# Altium PCB PCB_BGA_Demo.PcbDoc
Units mil, origin at the board's own origin, x right, y up, seen from the top; angles counter-clockwise.
Board outline 6000 x 4000 mil, 6 copper layers (Top Layer, Layer 3, Layer 1, Layer 2, Layer 4, Bottom Layer), stack 34.512 mil thick; 21 components, 42 nets, 118 pads, 35 vias.
Unrouted connection lines stored in the file: 11.
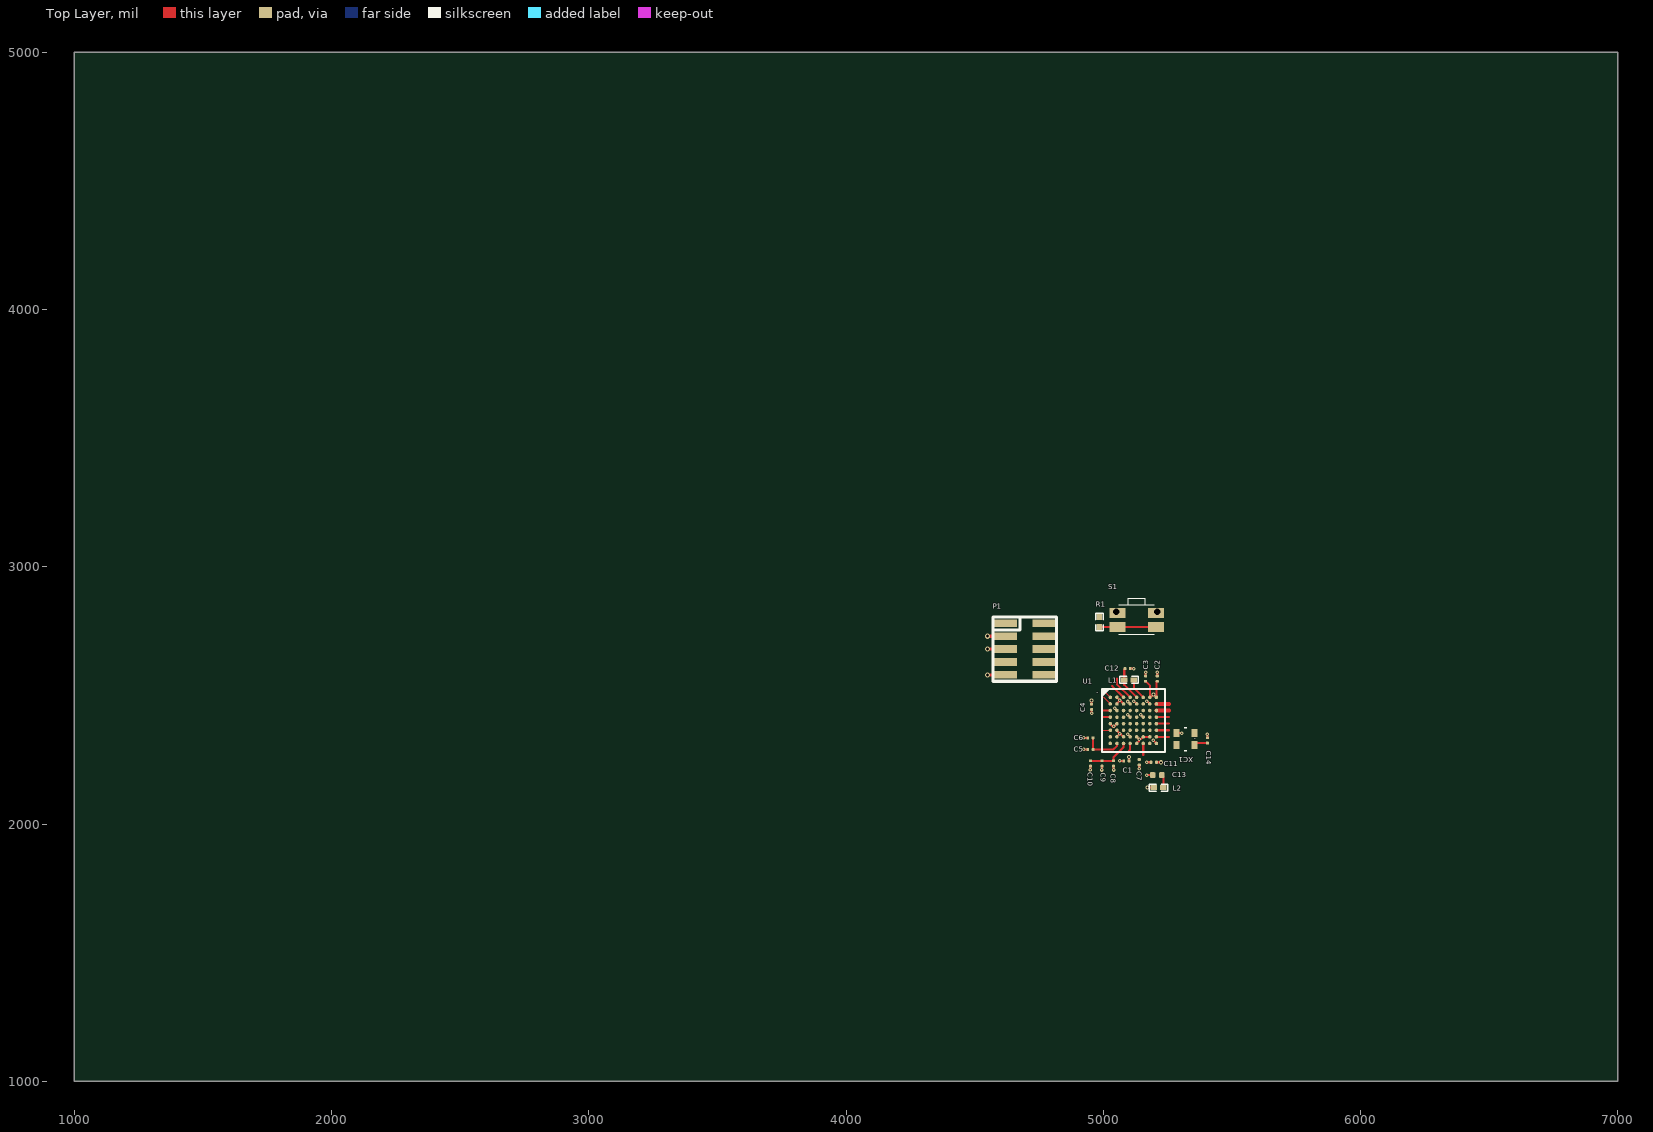
[diagram p0: Top Layer view]
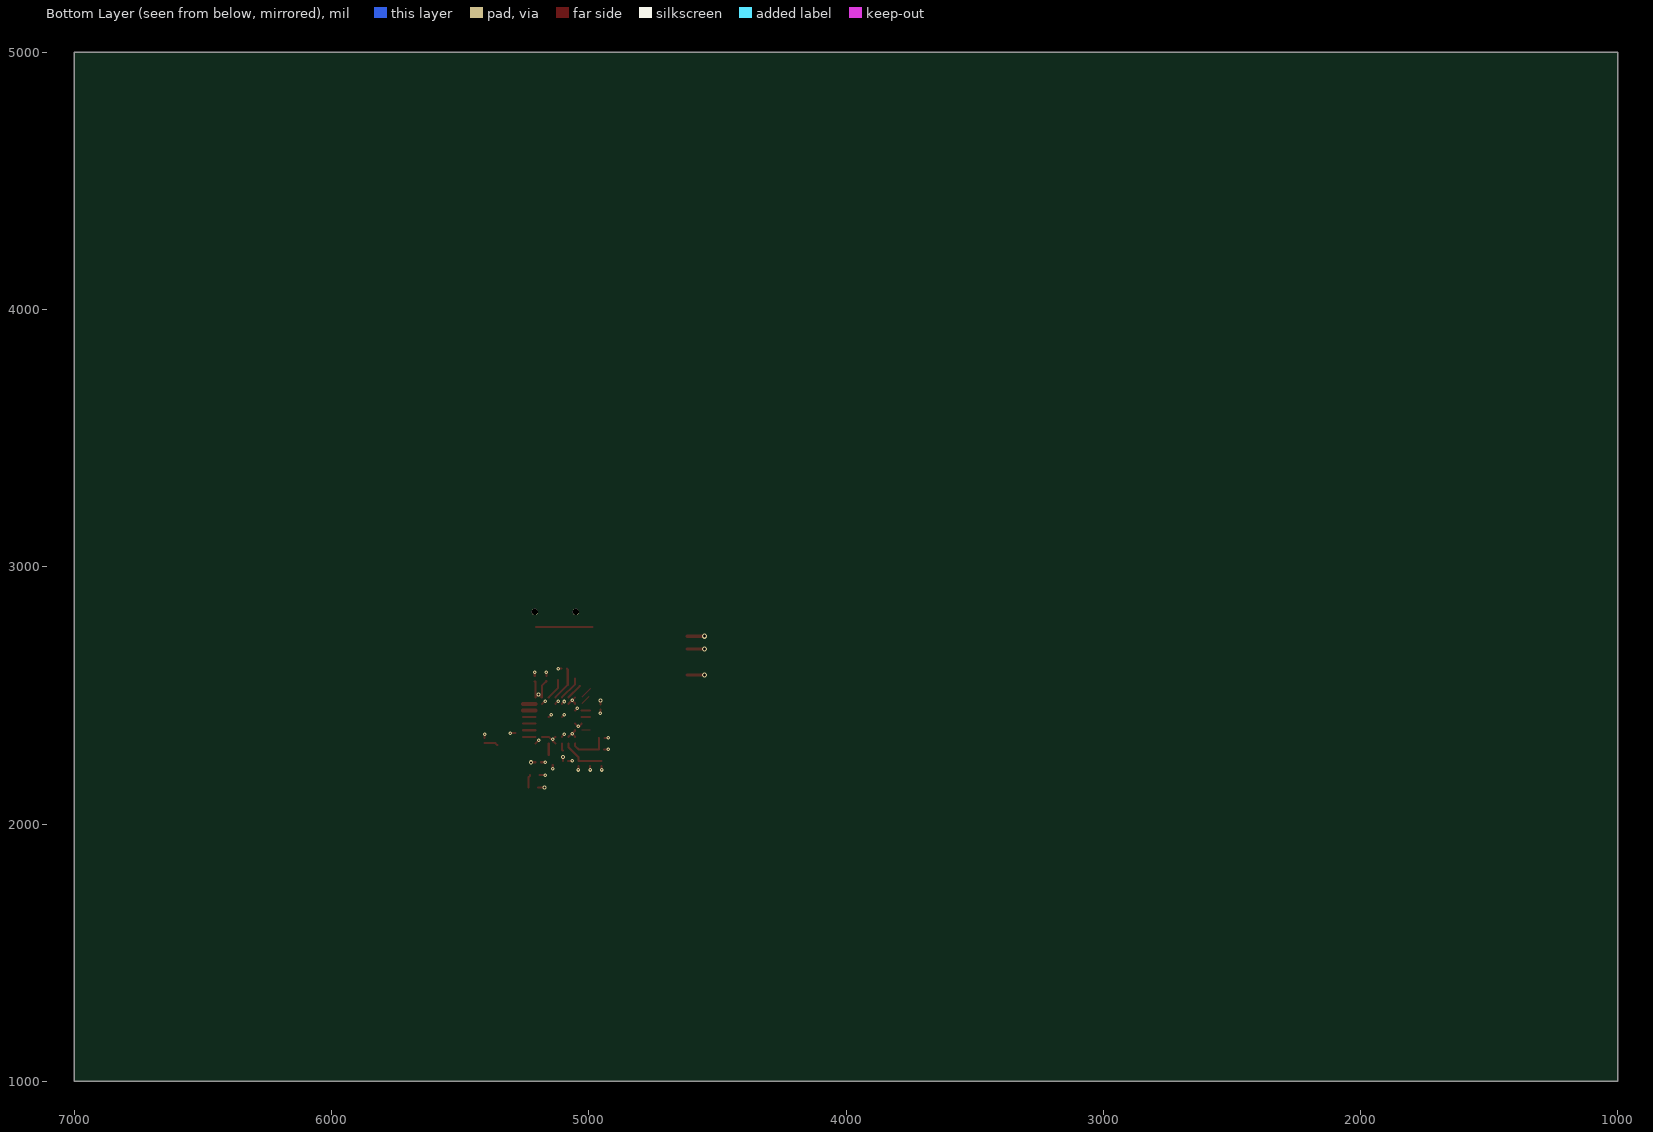
[diagram p1: Bottom Layer view, seen from below]
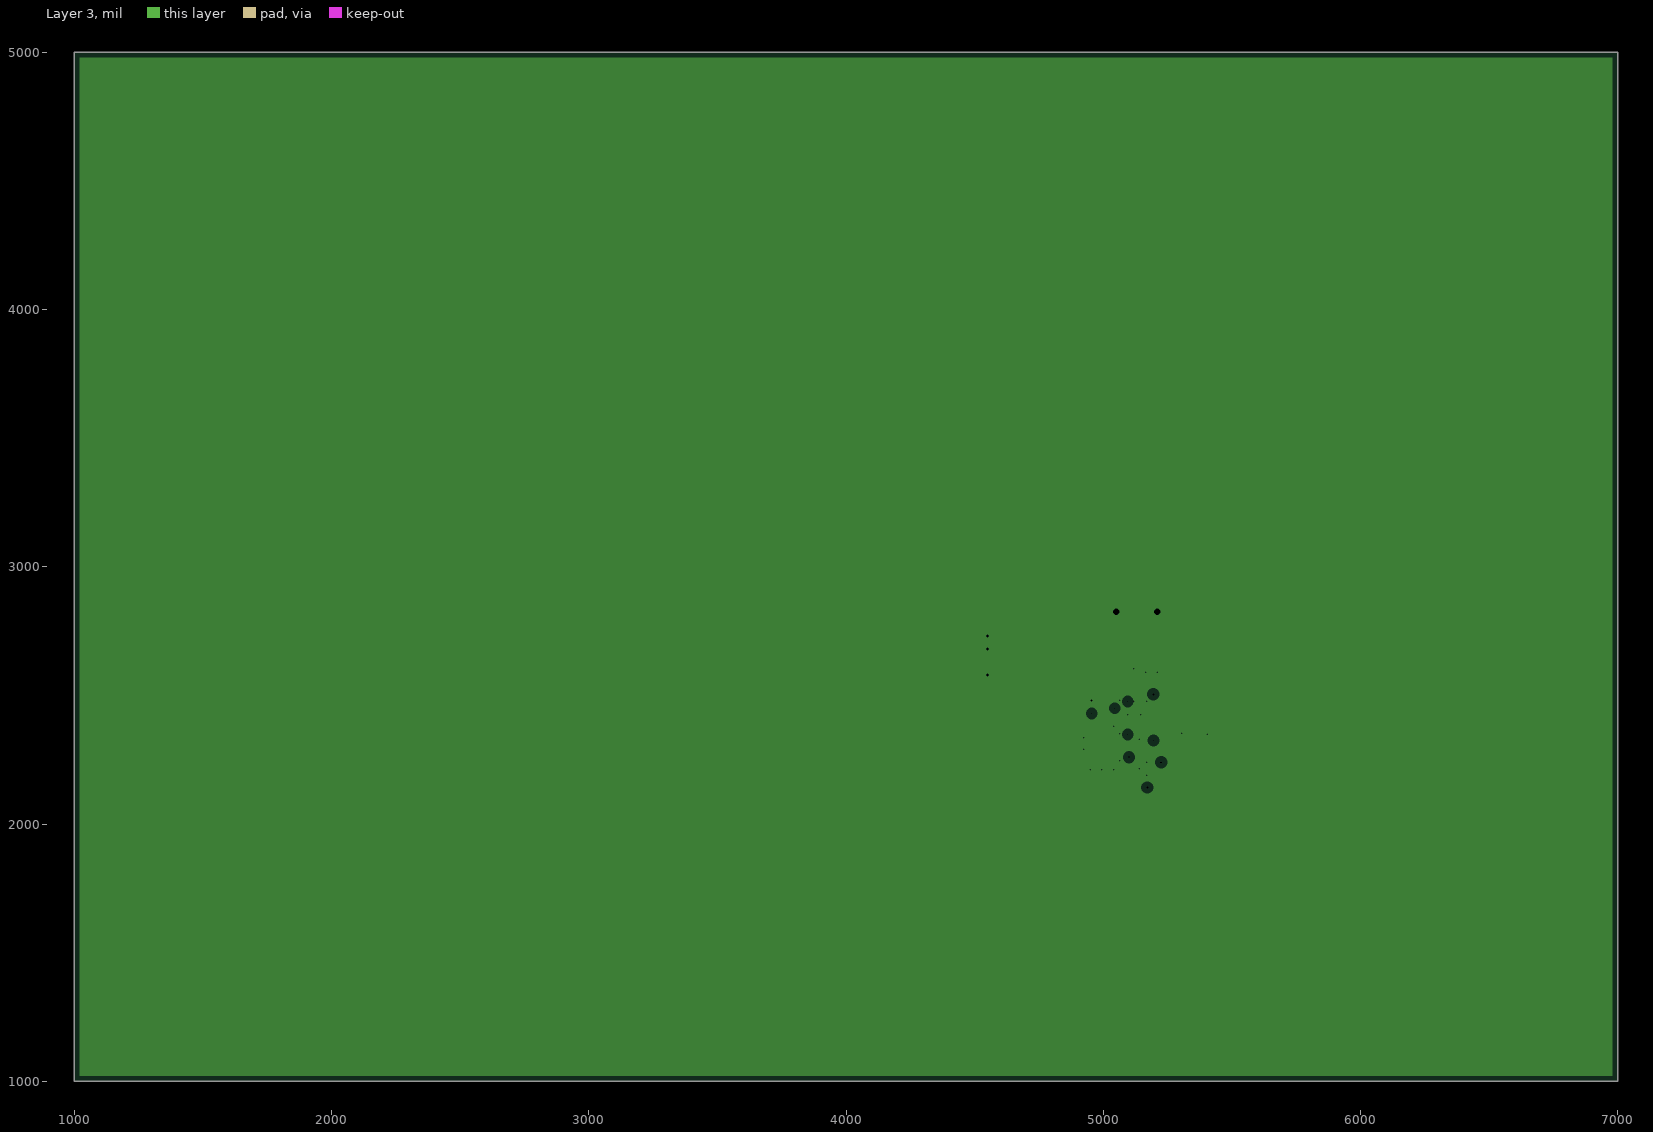
[diagram p2: Layer 3, clearances drawn from the general rule]
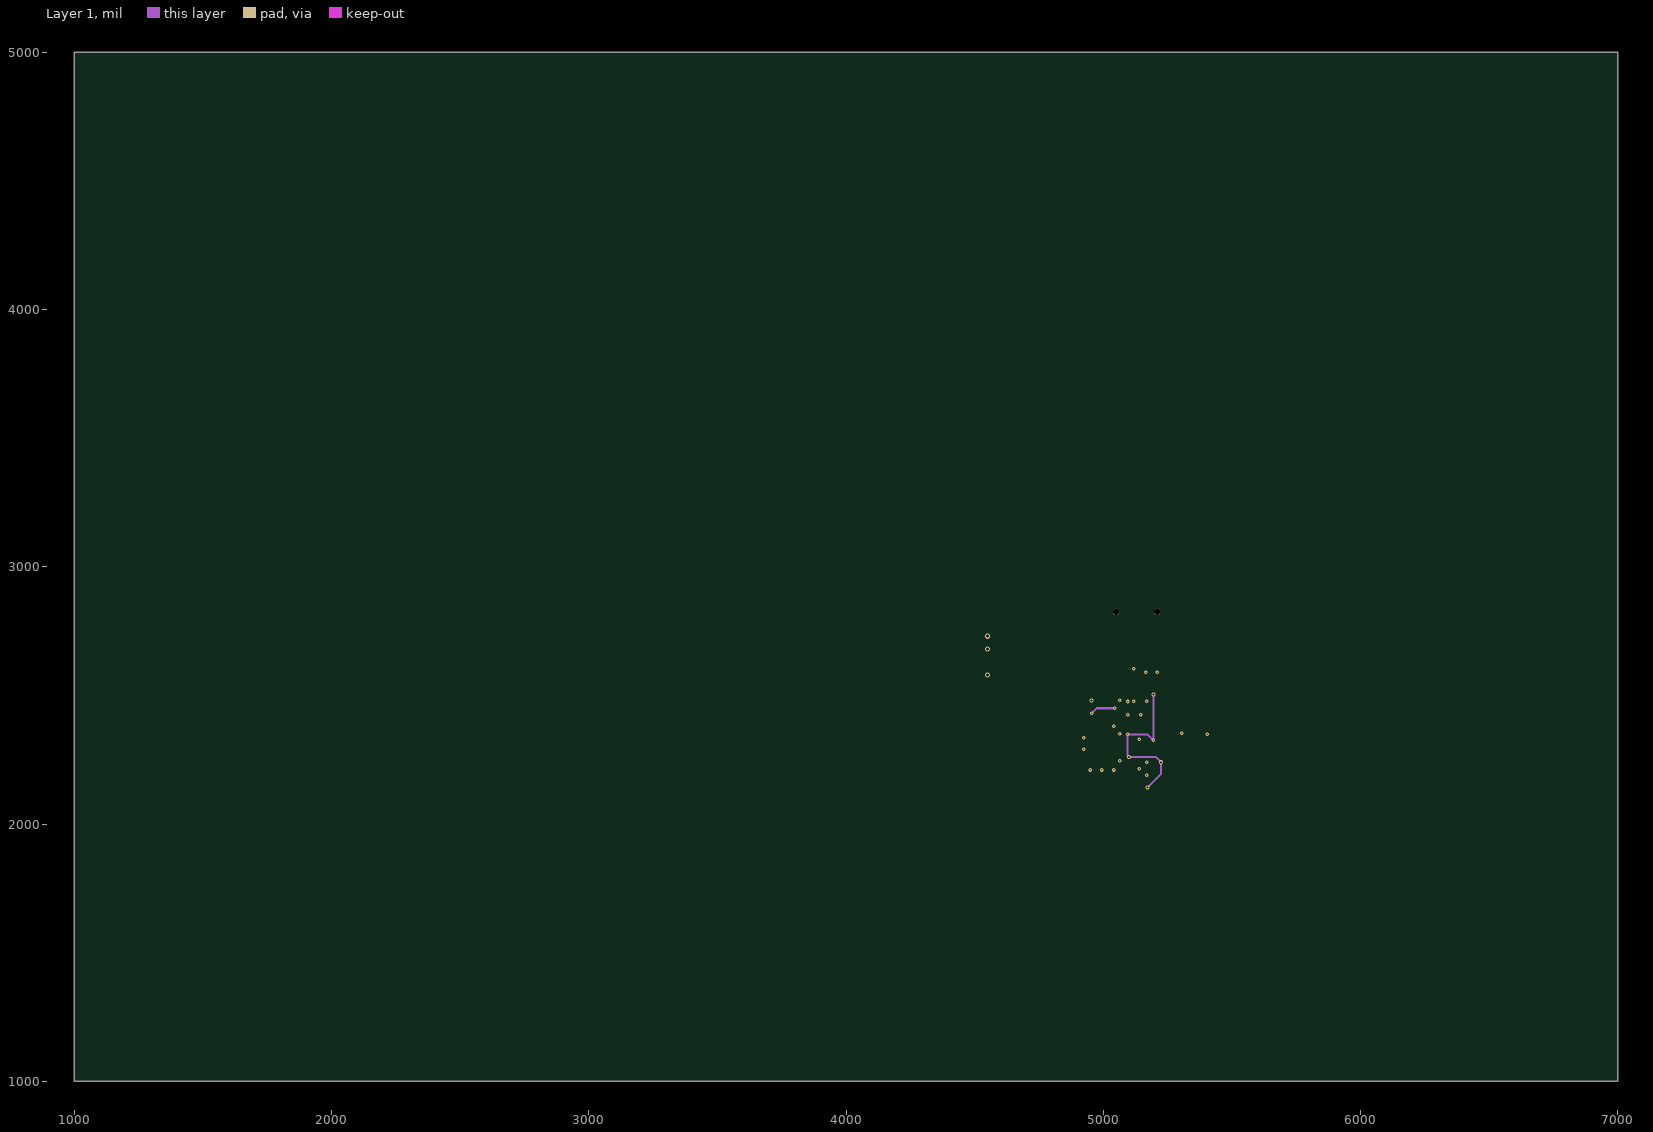
[diagram p3: Layer 1]
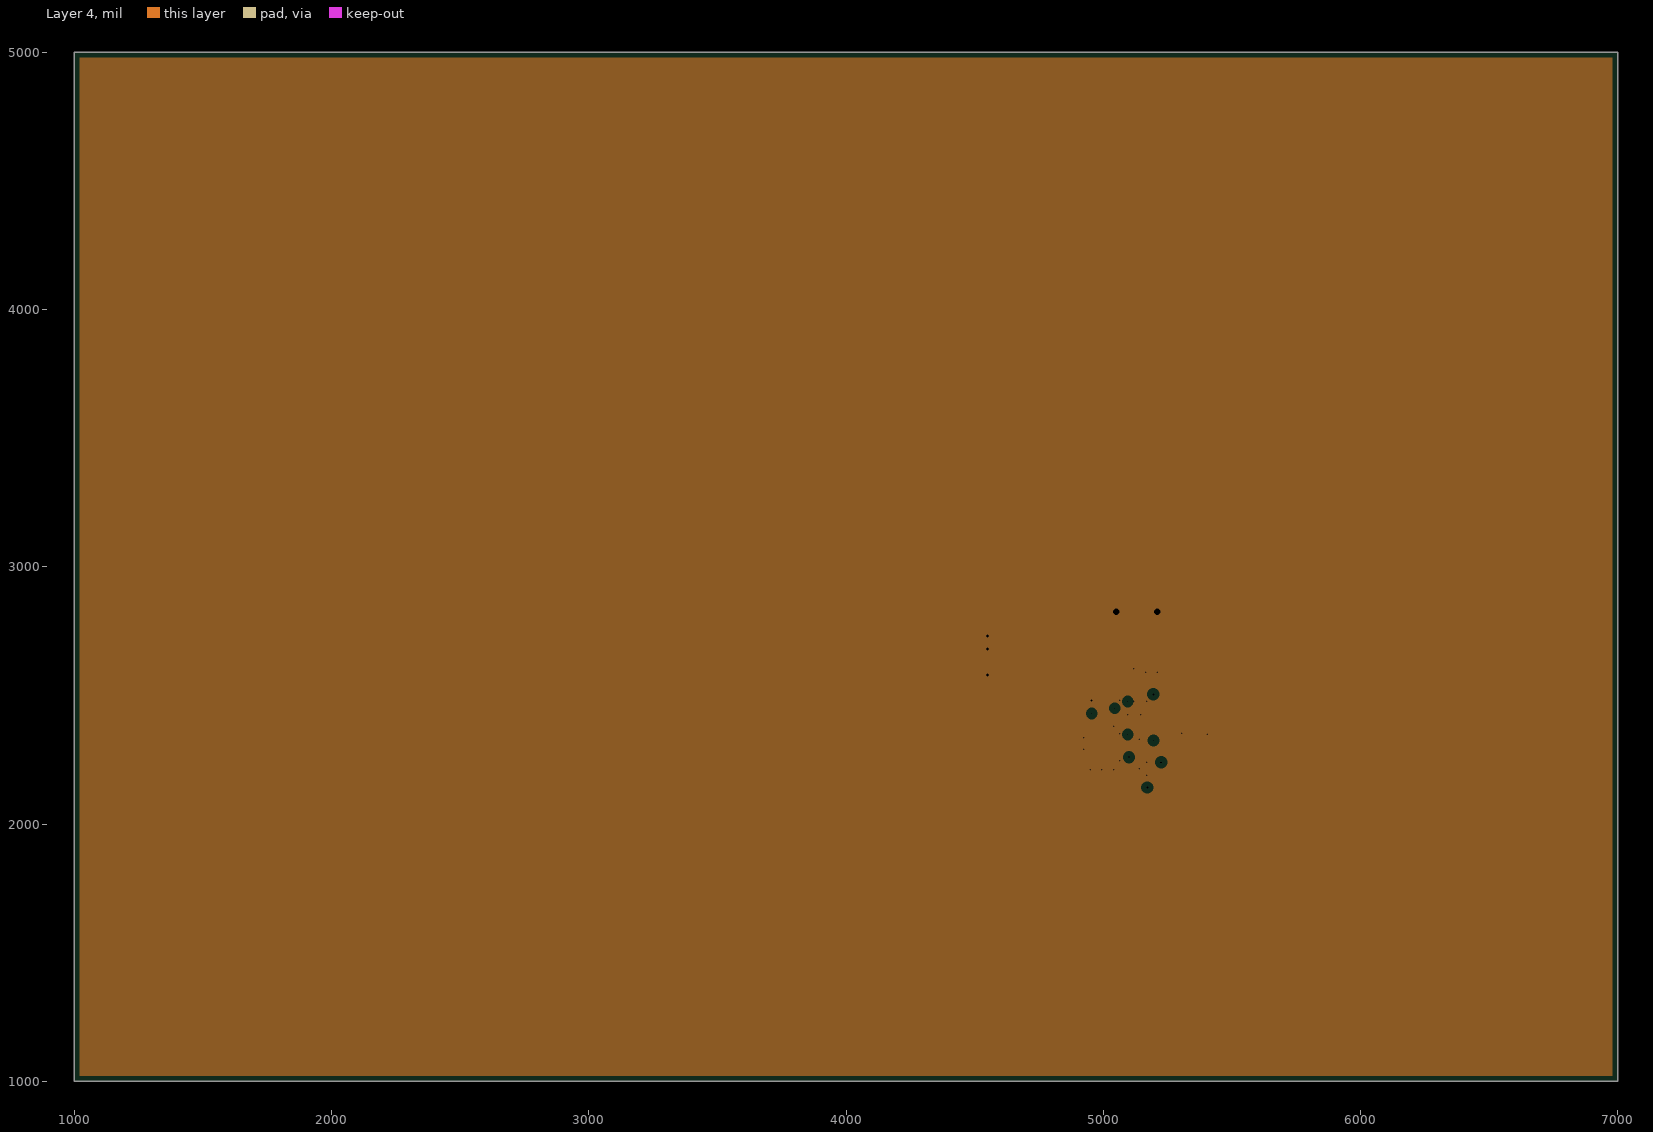
[diagram p4: Layer 4, clearances drawn from the general rule]
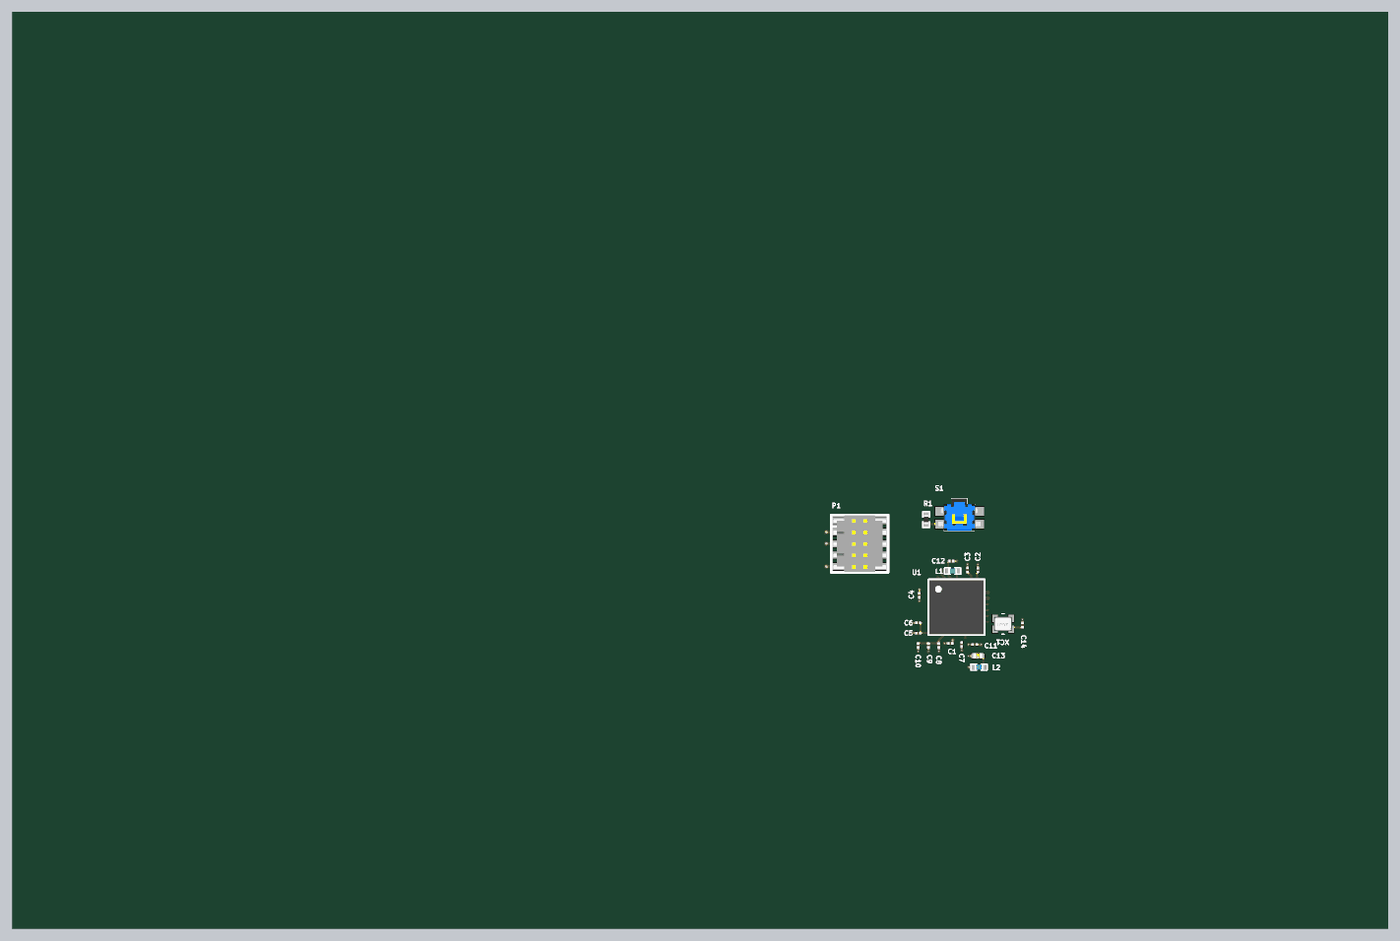
[diagram p5: 3D render of the assembled board from above, using the file's embedded part models]

## Layer stack, top to bottom
Top Solder: solder mask 0.4, Solder Resist, Dk 3.5
Top Layer: signal copper 1.4
Dielectric 4: prepreg 2.8, PP-006, Dk 4.1
Layer 3: plane copper 1.3779, net GND
Dielectric 2: core 4, Core-009, Dk 4.5
Layer 1: signal copper 1.3779
Dielectric 1: dielectric 12.6, FR-4, Dk 4.8
Layer 2: signal copper 1.3779
Dielectric 3: core 4, Core-009, Dk 4.5
Layer 4: plane copper 1.3779, net GND
Dielectric 5: prepreg 2.8, PP-006, Dk 4.1
Bottom Layer: signal copper 1.4
Bottom Solder: solder mask 0.4, Solder Resist, Dk 3.5

## Board outline
1000,1000 7000,1000 7000,5000 1000,5000

## Design rules (kind name [scope] priority, off if disabled: settings)
Clearance [All] p1: gap=4 ignorepadtopadclearanceinfootprint=TRUE
DiffPairsRouting "Schematic Differential Pairs Routing_3" [InNet('DATA_P')] p1: maxlimit=10 minlimit=10 mostfreqgap=10 toplayer_minwidth=15 toplayer_maxwidth=15 toplayer_prefwidth=15 midlayer1_minwidth=15 midlayer1_maxwidth=15 midlayer1_prefwidth=15 midlayer2_minwidth=15 midlayer2_maxwidth=15 midlayer2_prefwidth=15 bottomlayer_minwidth=15 bottomlayer_maxwidth=15 bottomlayer_prefwidth=15 impedanceprofiledriven=TRUE maxuncoupledlength=500
DiffPairsRouting "Schematic Differential Pairs Routing_2" [InNet('DATA_N')] p2: maxlimit=10 minlimit=10 mostfreqgap=10 toplayer_minwidth=15 toplayer_maxwidth=15 toplayer_prefwidth=15 midlayer1_minwidth=15 midlayer1_maxwidth=15 midlayer1_prefwidth=15 midlayer2_minwidth=15 midlayer2_maxwidth=15 midlayer2_prefwidth=15 bottomlayer_minwidth=15 bottomlayer_maxwidth=15 bottomlayer_prefwidth=15 impedanceprofiledriven=TRUE maxuncoupledlength=500
DiffPairsRouting [All] p3: maxlimit=10 minlimit=10 mostfreqgap=10 toplayer_minwidth=15 toplayer_maxwidth=15 toplayer_prefwidth=15 midlayer1_minwidth=15 midlayer1_maxwidth=15 midlayer1_prefwidth=15 midlayer2_minwidth=15 midlayer2_maxwidth=15 midlayer2_prefwidth=15 bottomlayer_minwidth=15 bottomlayer_maxwidth=15 bottomlayer_prefwidth=15 maxuncoupledlength=500
PlaneClearance [All] p1: clearance=20
PlaneConnect [All] p1: planeconnectstyle=Relief reliefexpansion=20 reliefentries=4 reliefconductorwidth=10 reliefairgap=10
PolygonConnect [All] p1: connectstyle=Relief reliefconductorwidth=10 reliefentries=4 polygonreliefangle="90 Angle" airgapwidth=10
RoutingVias [All] p1: holewidth=7.87 width=15.75 viastyle="Through Hole" minholewidth=5.91 minwidth=13.78 maxholewidth=11.81 maxwidth=19.68
SolderMaskExpansion [All] p1: expansion=4
Width "Schematic Width Constraint_1" [InNetClass('50 Ohms Rf')] p1: maxlimit=3.75 minlimit=2.93 preferedwidth=3.75 toplayer_maxwidth=2.93 toplayer_prefwidth=2.93 midlayer1_minwidth=3.5 midlayer1_maxwidth=3.5 midlayer1_prefwidth=3.5 midlayer2_minwidth=3.75 bottomlayer_maxwidth=2.93 bottomlayer_prefwidth=2.93 impedanceprofiledriven=TRUE minimp=50.000000 maximp=50.000000 favimp=50.000000
Width [All] p2: maxlimit=12 minlimit=5 preferedwidth=8
27 further rules are at their usual default settings.

## Classes and differential pairs
differential pair class DiffPCI: DATA
net class "50 Ohms Rf": NetU1_A1 NetU1_B1 NetU1_F1
differential pair DATA: +DATA_P -DATA_N

## Components (designator, comment, footprint, x,y, rotation, side; value= is the part's Value field where it differs from the comment)
C1 "CAP-NONPOL" AP1-00032 5090,2245 r180 top value=100nF
C2 "CAP-NONPOL" AP1-00032 5210,2565 r90 top value=100nF
C3 "CAP-NONPOL" AP1-00032 5165,2565.33 r90 top value=100nF
C4 "CAP-NONPOL" AP1-00032 4955,2455 r90 top value=100nF
C5 "CAP-NONPOL" AP1-00032 4950.33,2290 r180 top value=33pF
C6 "CAP-NONPOL" AP1-00032 4950,2335 r180 top value=100nF
C7 "CAP-NONPOL" AP1-00032 5140,2240 r270 top value=100nF
C8 "CAP-NONPOL" AP1-00032 5040,2235.33 r270 top value=100nF
C9 "CAP-NONPOL" AP1-00032 4995,2235.33 r270 top value=100nF
C10 "CAP-NONPOL" AP1-00032 4950,2235.33 r270 top value=100nF
C11 "CAP-NONPOL" AP1-00032 5196.44,2240 r180 top value=100nF
C12 "CAP-NONPOL" AP1-00032 5095,2603.82 r0 top value=100nF
C13 "CAP-NONPOL" AP1-00101 5210,2190 r180 top value=10uF
C14 "CAP-NONPOL" AP1-00032 5405,2325 r90 top value=100nF
L1 "[APPSSHA]" INDC1005X04L 5100.33,2560.59 r0 top value=BLM15AG121SN1D
L2 "[APPSSHA]" INDC1005X04L 5215,2141.55 r180 top value=BLM15AG121SN1D
P1 "Pin Header 2x5, 1.27mm" HDR_2x5-SMD-1.27mm-K 4695,2680 r270 top
R1 "Chip Resistor 10 kOhm 5% 1/20 W 0201" RESC1005X04L 4985,2785 r90 top value="4.7 k"
S1 "434331013822" 4343x10138xx 5130,2795 r180 top
U1 "ATSAMR34 BGA-64" AP6-00509 5117.2,2402.8 r0 top value=SAMR34J18B
XC1 "ACT33T-4 TCXO" AP7-00106 5320,2330 r180 top value="32MHz TCXO"

## Footprints (in the part's own frame and the unit in brackets; to place one, negate y for a bottom-side part, rotate by r counter-clockwise, add the part's x,y. Pads: shape width x height; smd on the part's side, far side on the other; paste and mask are expansions set on the pad)
4343x10138xx [mm] "WS-TASU 3.5x2.9 mm SMD side push"
  rect 1.6x1 smd: 1(-1.9,0.75) 2(1.9,0.75) 3(-1.9,-0.65) 4(1.9,-0.65)
  round 0.65 hole 0.65: 3(-2.025,-0.75) 4(2.025,-0.75)
  silkscreen extent -1.75,-2.1 1.75,1.45, body extent -2.35,-2.1 2.35,1.45, height 1.35
AP1-00032 [mm]
  rrect50% 0.275x0.3 smd mask+0.064: 1(-0.262,0) 2(0.262,0)
  body extent -0.31,-0.15 0.29,0.15, height 0.3
AP1-00101 [mm]
  rrect50% 0.55x0.6 smd: 1(-0.45,0) 2(0.45,0)
  body extent -0.5,-0.3 0.5,0.3, height 0.2
AP6-00509 [mm]
  round 0.35 smd: A1(-2.275,2.275) A2(-1.625,2.275) A3(-0.975,2.275) A4(-0.325,2.275) A5(0.325,2.275) A6(0.975,2.275) A7(1.625,2.275) A8(2.275,2.275) B1(-2.275,1.625) B2(-1.625,1.625) B3(-0.975,1.625) B4(-0.325,1.625) B5(0.325,1.625) B6(0.975,1.625) B7(1.625,1.625) B8(2.275,1.625) C1(-2.275,0.975) C2(-1.625,0.975) C3(-0.975,0.975) C4(-0.325,0.975) C5(0.325,0.975) C6(0.975,0.975) C7(1.625,0.975) C8(2.275,0.975) D1(-2.275,0.325) D2(-1.625,0.325) D3(-0.975,0.325) D4(-0.325,0.325) D5(0.325,0.325) D6(0.975,0.325) D7(1.625,0.325) D8(2.275,0.325) E1(-2.275,-0.325) E2(-1.625,-0.325) E3(-0.975,-0.325) E4(-0.325,-0.325) E5(0.325,-0.325) E6(0.975,-0.325) E7(1.625,-0.325) E8(2.275,-0.325) F1(-2.275,-0.975) F2(-1.625,-0.975) F3(-0.975,-0.975) F4(-0.325,-0.975) F5(0.325,-0.975) F6(0.975,-0.975) F7(1.625,-0.975) F8(2.275,-0.975) G1(-2.275,-1.625) G2(-1.625,-1.625) G3(-0.975,-1.625) G4(-0.325,-1.625) G5(0.325,-1.625) G6(0.975,-1.625) G7(1.625,-1.625) G8(2.275,-1.625) H1(-2.275,-2.275) H2(-1.625,-2.275) H3(-0.975,-2.275) H4(-0.325,-2.275) H5(0.325,-2.275) H6(0.975,-2.275) H7(1.625,-2.275) H8(2.275,-2.275)
  silkscreen extent -3.1,-3.1 3.1,3.1, body extent -3,-3 3,3, height 1.2
AP7-00106 [mm]
  rect 0.6x0.8 smd: 1(-0.9,-0.6) 2(0.9,-0.6) 3(0.9,0.6) 4(-0.9,0.6)
  silkscreen extent -0.13,-1.14 0.14,1.14, body extent -1,-0.8 1,0.8, height 0.59
HDR_2x5-SMD-1.27mm-K [mm]
  rect 0.76x2.4 smd: 1(-2.54,-1.95) 2(-2.54,1.95) 3(-1.27,-1.95) 4(-1.27,1.95) 5(0,-1.95) 6(0,1.95) 7(1.27,-1.95) 8(1.27,1.95) 9(2.54,-1.95) 10(2.54,1.95)
  silkscreen extent -3.18,-3.15 3.18,3.15, body extent -3.14,-2.92 3.14,2.92, height 6.11
INDC1005X04L [mm] "Chip Inductor, 2-Leads, Body 1.0x0.5mm, IPC High Density"
  rect 0.65x0.5 smd: 1(-0.475,0) 2(0.475,0)
  silkscreen extent -0.9,-0.35 0.9,0.35, body extent -0.5,-0.3 0.5,0.3, height 0.5
RESC1005X04L [mm]
  rect 0.6x0.55 smd: 1(-0.5,0) 2(0.5,0)
  silkscreen extent -0.87,-0.38 0.88,0.38, body extent -0.5,-0.25 0.5,0.25, height 0.3

## Part data
C1 C2 C3 C4 C5 C6 C7 C8 C9 C10 C11 C12: "Ceramic capacitor, SMD 0201, C0G/NP0, 25V, +/-2%", Manufacturer="Johanson Technology", MPN=250R05L330GV4T, TemperatureRange="-55 to +125 deg", Tolerance=+/-2%, AN=A01-0831, ComponentStatus="'Active (verified)'", FootprintStatus="'Active (Verified)'", Height=0.0130000002682209, PartGroup="Capacitors,Ceramic,SMD 0201", Status=Active, Verified by="Lars Helge Mo", Verified date=2005-12-15
C13: "Ceramic capacitor, SMD 0402, X5R, 6.3V, 20%", Manufacturer=Murata, MPN=GRM155R60J106ME15, TemperatureRange="-55 to 85 Deg.C", Tolerance=+/-20%, AN=A01-0778, ComponentStatus="'Active (verified)'", FootprintStatus="'Active (Verified)'", Height=0.5, PartGroup="Capacitors,Ceramic,SMD 0402", Status=Active, Verified by="Lars Helge Mo", Verified date=2005-12-15
C14: library part CAP-NONPOL_3, "Ceramic capacitor, SMD 0201, C0G/NP0, 25V, +/-2%", Manufacturer="Johanson Technology", MPN=250R05L330GV4T, TemperatureRange="-55 to +125 deg", Tolerance=+/-2%, AN=A01-0831, ComponentStatus="'Active (verified)'", FootprintStatus="'Active (Verified)'", Height=0.0130000002682209, PartGroup="Capacitors,Ceramic,SMD 0201", Status=Active, Verified by="Lars Helge Mo", Verified date=2005-12-15
L1 L2: library part INDUCTOR, "Chip Bead, 120ohm@100Mhz, 0.55A, 0402, Rdc 0.19ohm", Manufacturer=Murata, MPN=BLM15AG121SN1D, TemperatureRange="-55 to +125℃", Tolerance=25%, AN=A03-0216, ComponentStatus="'New (not verified)'", FootprintStatus="'Active (Verified)'", Height=0.600000023841858, PartGroup=Inductors,EMI, Status=Active, Verified by="Lars Helge Mo", Verified date=2006-01-30
P1: "Pin Header 2x5, 1.27mm (50mil), SMD, Keying Shroud", 2nd source part number=FTSH-105-01-F-DV-K, Manufacturer=W-CON, Manufacturer Part Number=3132-10MS0BK00R1, Part Number="Pin Header 2x5 SMD, 1.27mm, KS", 2nd source Supplier=Samtec, Artikkelnr Noca=55010009, Artikkelnr Simpro=N.A., Datasheet=\\hizz\pro\app9717\Datasheet\connectores\W-CON\3132-XXMXXBK00XX.pdf, Footprint Doc=HDR_2x5-SMD-1.27mm, LatestRevisionDate=2016-04-21, Pin Count=10, Published=2016-01-22, Publisher="Nordic Semiconductor", Supplier=Cabcon, Supplier part number=3132-10MS0BK00R1
R1: library part R2_2, "Thick film resistor, SMD 0201, 1/20W, 5%", Manufacturer=ROHM, MPN=MCR006YZPJ472, TemperatureRange=5%, AN=A02-0536, ComponentStatus="'Active (verified)'", FootprintStatus="'Active (Verified)'", PartGroup="Resistors,SMD,0201 5%", Status=Active, Verified by="Lars Helge Mo", Verified date=2005-12-19
S1: "WS-TASU SMT Tact Switch 3.5x2.9mm side push", Operating Temperature="-40 to +85degC", Rated Current=50mA, Rated Voltage=12VDC, ComponentLink1Description=Manufacturer, ComponentLink1URL=http://www.we-online.de, ComponentLink2Description=Datasheet, ComponentLink2URL=https://katalog.we-online.com/em/datasheet/434331013822.pdf, Contact Material="Stainless Steel", Contact Plating=Silver, Height=1.35mm, Mounting Technology=SMT, Operation Force=220g, Packaging="Tape and Reel", Part Number=434331013822, Published Date="September 2019", Publisher="Wurth Elektronik", Terminal Material="Copper Alloy", Terminal Plating=Silver, Washable=No
U1: "SAMR34 BGA-64", AN=A06-1593, ComponentStatus="'New (not verified)'", FootprintStatus="'New (Not verified)'", Height=1.20000004768372, PartGroup="Integrated Circuits"
XC1: "32MHz TCXO, 2.8 ~ 3.3V, Clipped sine wave 10kOhm/10pF, 2 x 1.6 mm SMD", Manufacturer="Taitien Electronics", MPN=TYETBCSANF-32.000000, TemperatureRange="-20  to  +70°C", Tolerance=+/-1ppm, AN=A07-0161, ComponentStatus="'New (not verified)'", Height=0.800000011920929, PartGroup="Frequency devices,Oscillators"

## Via types
v1: diameter 13.78, hole 5.91, Top Layer to Bottom Layer, tented both sides, 27 vias
v2: diameter 15.75, hole 7.87, Top Layer to Bottom Layer, tented both sides, 5 vias
v3: diameter 19.68, hole 11.81, Top Layer to Bottom Layer, tented both sides, 3 vias

## Nets (pads, with @x,y where several pads share a name; then routed paths per layer and width w, separated by ;. In a path a pad name is that pad's centre, name@x,y a point inside that pad or via, vN(x,y) a via of type N, cw(c..) or ccw(c..) an arc to the next point about the centre after c; other vN are vias at no path point)
DATA_N: U1.B8 | length 48.2
  Top Layer w15: U1.B8 5255,2466.77
DATA_P: U1.C8 | length 48.2
  Top Layer w15: U1.C8 5255,2441.18
GND: C1.2 C2.2 C3.2 C4.2 C5.2 C6.2 C7.2 C8.2 C9.2 C10.2 C11.2 C12.2 C13.2 C14.2 P1.3 P1.5 P1.9 S1.3 S1.4 U1.A2 U1.B2 U1.B3 U1.B5 U1.B7 U1.D4 U1.D6 U1.E1 U1.E2 U1.F2 U1.G2 U1.G3 U1.G5 U1.G6 U1.G7 U1.H5 XC1.2 | length 723.8
  Top Layer w8: v1(4925,2290) C5.2 ; v1(4925,2335) C6.2 ; v1(4950,2210) C10.2 ; C4.2 v2(4955,2480) ; v1(4995,2210) C9.2 ; U1.E1 5027.64,2389.13 v1@5040,2376.77 ; v1(5040,2210) C8.2 ; v1(5040,2380) v1@5040,2376.77 ; U1.G2 v1(5065,2350.59) ; U1.F2 5053.23,2362.85 5056.12,2359.96 5056.12,2359.47 v1(5065,2350.59) ; U1.E2 v1@5040,2376.77 ; U1.B2 5053.23,2468.34 5056.12,2471.23 5056.12,2471.71 v1(5065,2480.59) ; U1.A2 v1(5065,2480.59) ; v1(5065,2245) C1.2 ; U1.G3 5068.15,2349.48 5066.11,2349.48 v1(5065,2350.59) ; U1.B3 v1(5065,2480.59) ; v1(5095,2425) U1.D4 ; C12.2 v1(5117.85,2603.82) ; v1(5119.04,2477.74) U1.B5 ; U1.H5 5130,2313.5 5138.89,2322.4 5138.89,2327.71 v1(5140,2328.82) ; U1.G5 v1(5140,2328.82) ; v1(5140,2215) C7.2 ; v1(5146.42,2424.76) U1.D6 ; C3.2 v1(5165,2590) ; v1(5170,2190) C13.2 ; v1(5170,2240) C11.2 ; v1(5170,2477.95) U1.B7 ; U1.G7 U1.G6 5155.31,2338.82 5146.42,2329.92 5141.11,2329.92 v1(5140,2328.82) ; C2.2 v1(5210,2590) ; XC1.2 v1(5305,2353.62) ; C14.2 v1(5405,2349.48)
  Top Layer w12: v3(4550,2580) P1.9 ; v3(4550,2680) P1.5 ; v3(4550,2730) P1.3
NetC4_1: C4.1 U1.C2 | length 124.8
  Top Layer w8: v1(4955,2430) C4.1 ; v1(5044.41,2450) U1.C2
  Layer 1 w8: v1(4955,2430) 4975,2450 v1(5044.41,2450)
NetC5_1: C5.1 C6.1 U1.H2 | length 153.2
  Top Layer w8: C6.1 4960.67,2334.67 C5.1 5040,2290 5052.87,2302.87 5052.87,2312.87 U1.H2
NetC7_1: C7.1 U1.H4 | length 29.9
  Top Layer w8: 5100.33,2285 5104.41,2289.07 U1.H4
NetC12_1: C12.1 L1.1 U1.A5 | length 132.7
  Top Layer w8: C12.1 5084.67,2603.33 5081.63,2600.3 L1.1 5081.63,2540.73 U1.A5
NetC14_1: C14.1 U1.F5 XC1.4 | length 53.3
  Top Layer w8: XC1.4 5355.43,2306.85 5363.24,2314.67 C14.1
NetL1_2: L1.2 U1.A6 | length 83.4
  Top Layer w8: L1.2 5119.04,2528.92 U1.A6
NetP1_2: P1.2 U1.D5
NetP1_4: P1.4 U1.C5
NetP1_10: P1.10 R1.1 S1.1 S1.2 U1.B6 | length 219.9
  Top Layer w8: R1.1 5055.04,2765.32 S1.2 S1.1
NetU1_A1: U1.A1 | length 46.2
  Top Layer w2.93: 4995,2525 U1.A1
NetU1_A3: U1.A3 | length 62
  Top Layer w8: 5035,2536.18 U1.A3
NetU1_A4: U1.A4 | length 93.8
  Top Layer w8: 5053.23,2565 5053.23,2543.54 U1.A4
NetU1_B1: U1.B1 | length 39.1
  Top Layer w2.93: 5000,2494.41 U1.B1
NetU1_B4: U1.B4 | length 13.3
  Top Layer w8: v1(5095,2476.18) U1.B4
NetU1_C3: U1.C3
NetU1_C4: U1.C4
NetU1_C6: U1.C6
NetU1_C7: U1.C7
NetU1_D1: U1.D1 | length 32.6
  Top Layer w8: 4995,2415.59 U1.D1
NetU1_D2: U1.D2
NetU1_D3: U1.D3
NetU1_D7: U1.D7
NetU1_D8: U1.D8 | length 48.2
  Top Layer w8: U1.D8 5255,2415.59
NetU1_E3: U1.E3
NetU1_E4: U1.E4
NetU1_E5: U1.E5
NetU1_E6: U1.E6
NetU1_E7: U1.E7
NetU1_E8: U1.E8 | length 48.2
  Top Layer w8: U1.E8 5255,2390
NetU1_F1: U1.F1 | length 33.2
  Top Layer w2.93: 4994.41,2364.41 U1.F1
NetU1_F3: U1.F3
NetU1_F4: U1.F4
NetU1_F6: U1.F6
NetU1_F7: U1.F7
NetU1_F8: U1.F8 | length 48.2
  Top Layer w8: U1.F8 5255,2364.41
NetU1_G8: U1.G8 | length 48.2
  Top Layer w8: U1.G8 5255,2338.82
NetU1_H6: U1.H6 XC1.3 | length 45.4
  Top Layer w8: 5155.59,2267.88 U1.H6
VDD: C1.1 C2.1 C3.1 C11.1 L2.2 P1.1 R1.2 U1.A7 U1.A8 U1.G4 U1.H8 | length 889.4
  Top Layer w8: v1(5095,2348.23) U1.G4 ; C1.1 v2(5100.33,2259.67) ; C3.1 5165.49,2555 5166.91,2553.59 5166.91,2553.09 5181.18,2538.82 U1.A7 5182.75,2492.36 5185.63,2495.25 5186.12,2495.25 v2(5195,2504.13) U1.A8 5206.77,2551.44 5208.09,2552.76 5208.09,2553.25 5209.51,2554.67 C2.1 ; v2(5171.55,2141.55) L2.2 ; v1(5195,2325) U1.H8 ; C11.1 v2(5225,2240)
  Layer 1 w8: v2(5171.55,2141.55) 5225,2195 v2(5225,2240) 5205.33,2259.67 v2(5100.33,2259.67) 5100.33,2261.76 5095,2267.1 v1(5095,2348.23) 5171.77,2348.23 v1(5195,2325) v2(5195,2504.13)
VDDANA: C8.1 C9.1 C10.1 C13.1 L2.1 U1.C1 U1.H3 | length 257.2
  Top Layer w8: C10.1 C9.1 C8.1 5040,2260 5078.82,2298.82 U1.H3 ; 4995,2441.18 U1.C1 ; C13.1 5227.72,2188.25 5233.7,2182.27 L2.1
pads on no net: P1.6 P1.7 P1.8 U1.G1 U1.H1 U1.H7 XC1.1

## Polygon pours and split planes (outlines as drawn)
GND on Layer 3 (split plane): 6979.9,1020.1 1020.1,1020.1 1020.1,4979.9 6979.9,4979.9
GND on Layer 4 (split plane): 6979.9,1020.1 1020.1,1020.1 1020.1,4979.9 6979.9,4979.9

## Text inside footprints (layer, text, board x,y; h text height)
U1: Mechanical 11 "A1" at 5007.2,2492.8 h19.68